# Altium PCB FSBB20CH60C MC3PHAC - Serial.PcbDoc
Units mm, origin at the board's own origin, x right, y up, seen from the top; angles counter-clockwise.
Board outline 110.36 x 81.66 mm, 2 copper layers (Top Layer, Bottom Layer); 61 components, 0 nets, 231 pads, 24 vias.
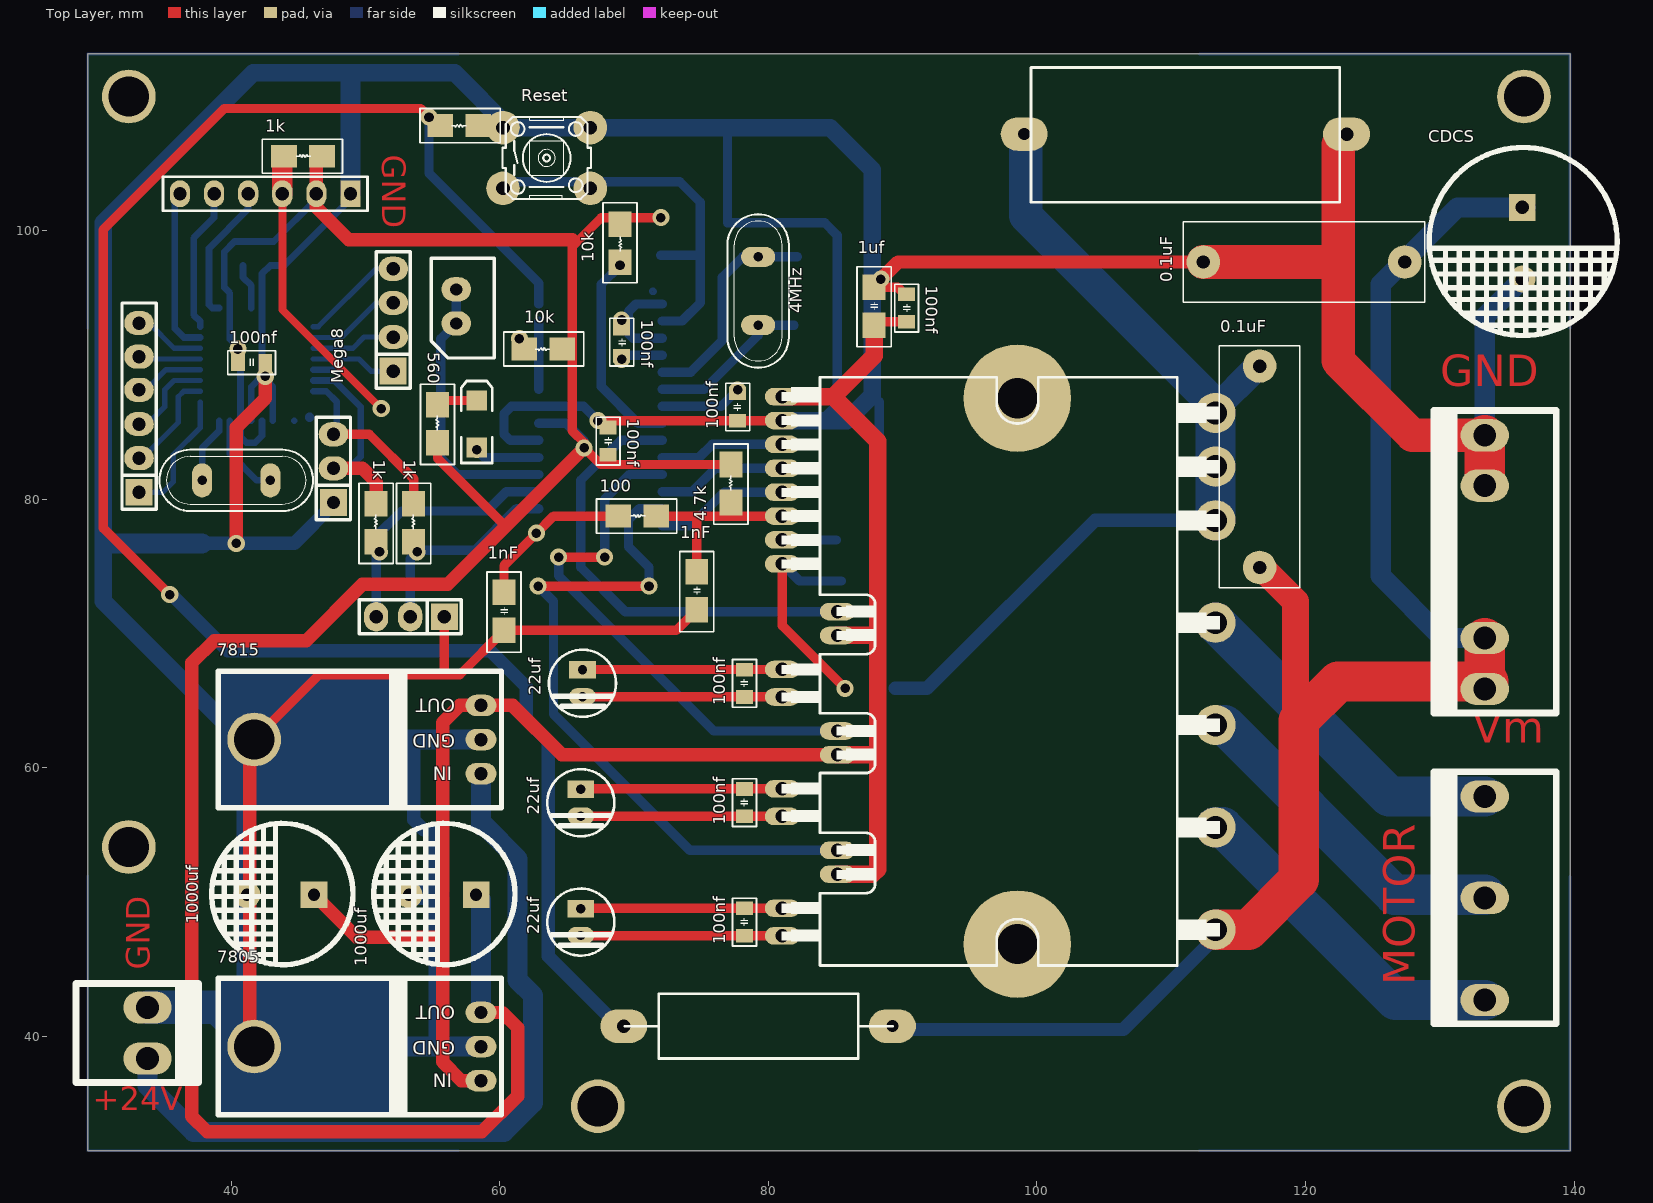
[diagram p0: Top Layer view]
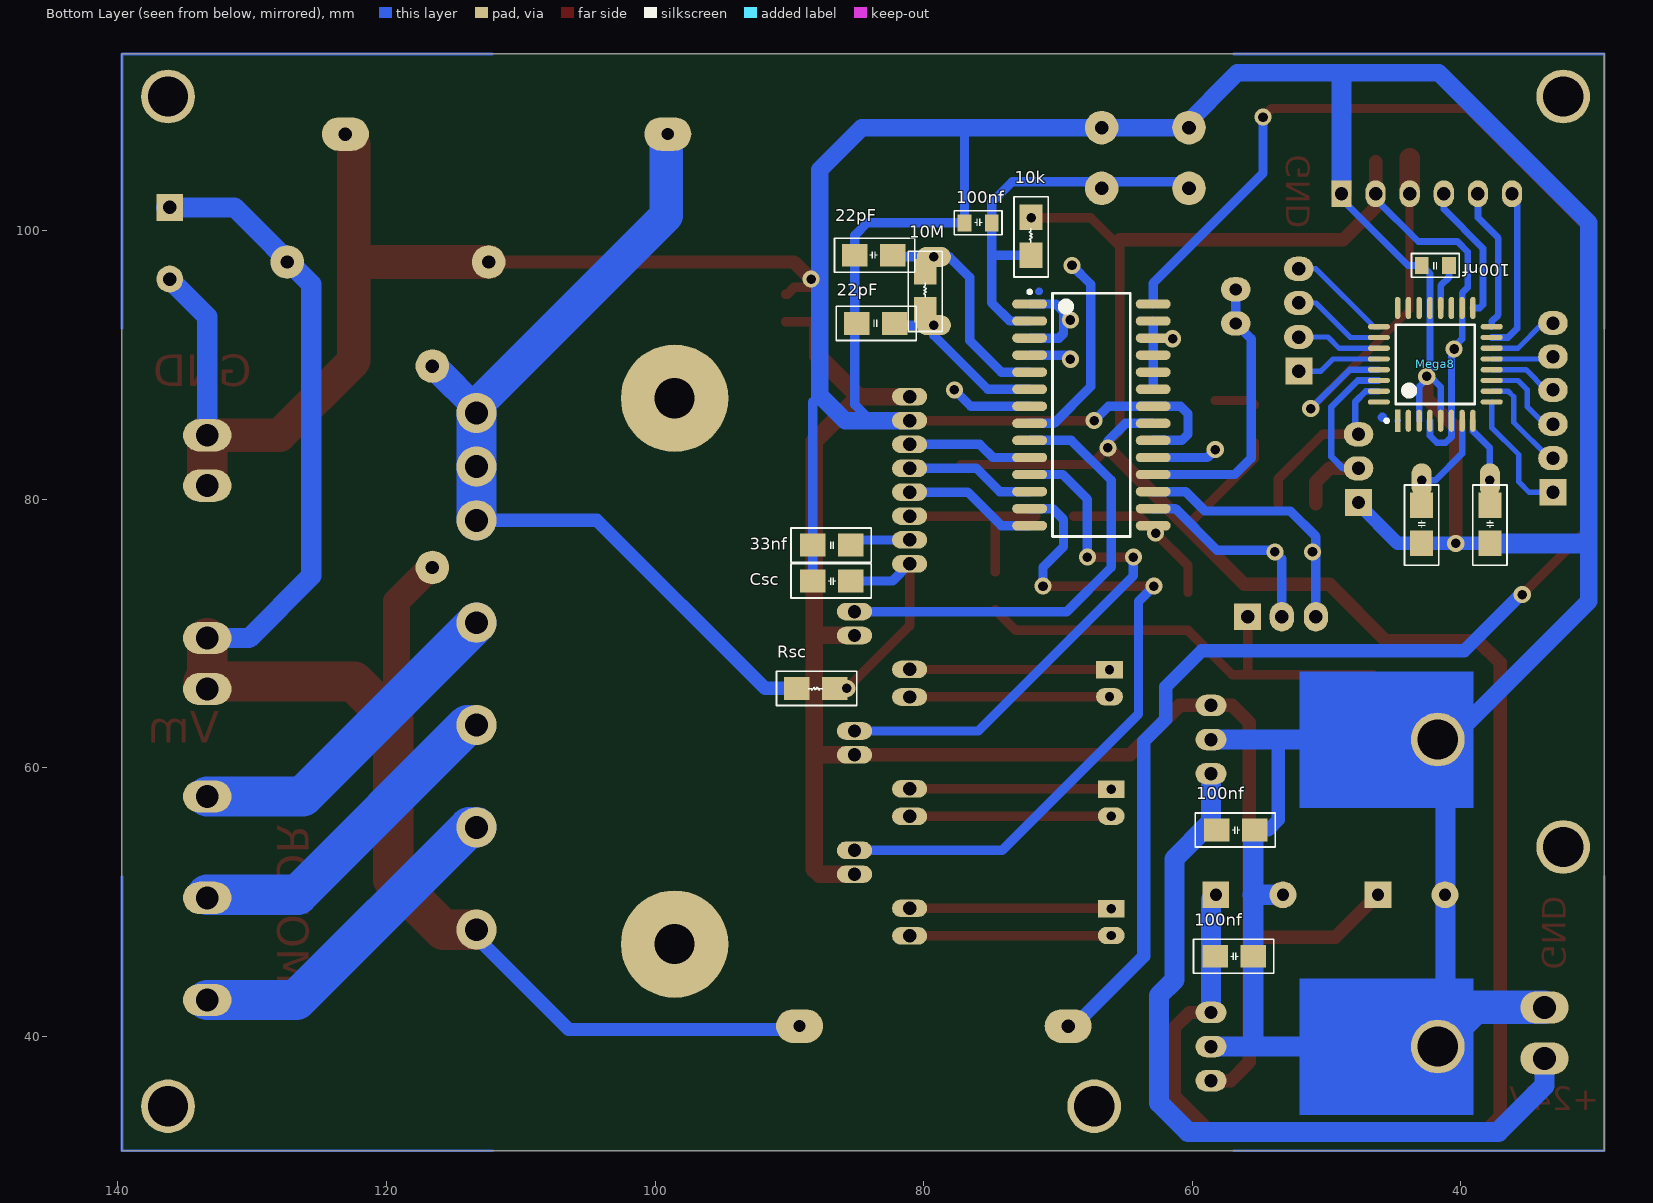
[diagram p1: Bottom Layer view, seen from below]

## Layer stack, top to bottom
Top Solder: solder mask 0.0102, Solder Resist, Dk 3.5
Top Layer: signal copper 0.0356
Dielectric 1: dielectric 0.32, FR-4, Dk 4.8
Bottom Layer: signal copper 0.0356
Bottom Solder: solder mask 0.0102, Solder Resist, Dk 3.5

## Board outline
29.337,31.496 29.337,113.157 139.7,113.157 139.7,31.496

## Design rules (kind name [scope] priority, off if disabled: settings)
Clearance [All] p1: gap=0.254
PolygonConnect [All] p1: connectstyle=Relief reliefconductorwidth=0.254 reliefentries=4 polygonreliefangle="90 Angle" airgapwidth=0.254
RoutingVias [All] p1: holewidth=0.711 width=1.27 viastyle="Through Hole" minholewidth=0.711 minwidth=1.27 maxholewidth=0.711 maxwidth=1.27
SolderMaskExpansion [All] p1: expansion=0.102
Width [All] p1: maxlimit=0.254 minlimit=0.254 preferedwidth=0.254
29 further rules are at their usual default settings.

## Components (designator, comment, footprint, x,y, rotation, side; value= is the part's Value field where it differs from the comment)
0.1uF "Comment" "CAP POL 15mm" 112.395,97.663 r0 top
0.1uF "Comment" "CAP POL 15mm" 116.586,89.916 r270 top
1k "Comment" "Res SMD 0805 & 1206" 53.594,76.835 r270 top
1k "Comment" "Res SMD 0805 & 1206" 50.8,76.835 r270 top
1k "Comment" "Res SMD 0805 & 1206" 43.942,105.537 r180 top
1nF "Comment" "CAP SMD 0805 & 1206" 60.325,70.231 r90 top
1nF "Comment" "CAP SMD 0805 & 1206" 74.676,71.755 r90 top
1uf "Comment" "CAP SMD 0805 & 1206" 87.884,92.964 r90 top
4.7k "Comment" "Res SMD 0805 & 1206" 77.216,79.756 r270 top
4MHz "Comment" XTAL 79.248,95.504 r90 top
10k "Comment" "Res SMD 0805 & 1206" 64.643,91.186 r0 top
10k "Comment" "Res SMD 0805 & 1206" 68.961,100.457 r90 top
10k "Comment" "Res SMD 0805 & 1206" 72.009,98.171 r270 bottom
10M "Comment" "Res SMD 0805 & 1206" 79.883,94.107 r270 bottom
22pF "Comment" "CAP SMD 0805 & 1206" 82.296,98.171 r0 bottom
22pF "Comment" "CAP SMD 0805 & 1206" 82.169,93.091 r0 bottom
22uf "Comment" "CAP 5MM" 66.167,66.294 r90 top
22uf "Comment" "CAP 5MM" 66.04,57.404 r90 top
22uf "Comment" "CAP 5MM" 66.04,48.514 r90 top
33nf "Comment" "CAP SMD 0805 & 1206" 88.265,76.581 r180 bottom
100 "Comment" "Res SMD 0805 & 1206" 68.834,78.74 r180 top
100nf "Comment" "CAP SMD 0805" 42.545,90.17 r180 top
100nf "Comment" "CAP SMD 0805" 42.926,97.409 r180 bottom
100nf "Comment" "CAP SMD 0805" 68.072,83.312 r90 top
100nf "Comment" "CAP SMD 0805" 78.232,67.31 r270 top
100nf "Comment" "CAP SMD 0805" 78.232,58.42 r270 top
100nf "Comment" "CAP SMD 0805" 78.232,49.53 r270 top
100nf "Comment" "CAP SMD 0805 & 1206" 58.166,55.372 r180 bottom
100nf "Comment" "CAP SMD 0805 & 1206" 58.293,45.974 r180 bottom
100nf "Comment" "CAP SMD 0805" 74.93,100.584 r0 bottom
100nf "Comment" "CAP SMD 0805" 77.724,87.884 r270 top
100nf "Comment" "CAP SMD 0805" 69.088,90.678 r90 top
100nf "Comment" "CAP SMD 0805" 90.297,93.218 r90 top
560 "Comment" "Res SMD 0805 & 1206" 55.372,84.201 r270 top
1000uf "Comment" "CAP 10MM" 43.688,50.546 r90 top
1000uf "Comment" "CAP 10MM" 55.753,50.546 r90 top
7805 "Comment" REG-SLEEP 50.165,39.243 r0 top
7815 "Comment" REG-SLEEP 50.165,62.103 r0 top
CDCS "Comment" "CAP 14MM" 136.144,99.06 r180 top
Csc "Comment" "CAP SMD 0805 & 1206" 88.265,73.914 r180 bottom
Mega8 "Comment" ATMEGA8-SMD 41.91,90.043 r90 top
Reset "Comment" SW-4PIN-Small 63.5,105.41 r0 top
Rsc "Comment" "Res SMD 0805 & 1206" 86.614,65.913 r180 bottom
? "Comment" "HEADER 4" 52.07,89.535 r270 top
? "Comment" PROG2 42.545,102.743 r180 top
? "Comment" XTAL 40.386,81.407 r180 top
? "Comment" "HEADER 3"#1 47.625,79.756 r270 top
? "Comment" "CAP SMD 0805 & 1206" 37.846,76.708 r90 bottom
? "Comment" "CAP SMD 0805 & 1206" 42.926,76.708 r90 bottom
? "Comment" "HEADER 6" 33.147,80.518 r270 top
? "Comment" "HEADER 3"#2 55.88,71.247 r0 top
? "Comment" "LED SMD 1206" 58.293,85.598 r90 top
? "Comment" "RES 5W" 99.06,107.188 r0 top
? "Comment" "PIN PWR 5" 133.35,50.292 r90 top
? "Comment" "PIN PWR 6" 133.35,75.311 r90 top
? "Comment" "PIN PWR 2" 33.782,40.259 r270 top
? "Comment" "Pin gerd 2pin" 56.769,94.361 r180 top
? "Comment" "RES 2W" 79.248,40.767 r180 top
? "Comment" "Res SMD 0805 & 1206" 58.42,107.823 r0 top
? "Comment" FSBB30CH60C 97.155,67.564 r0 top
? "Comment" MC3PHAC(SOIC-28) 67.464,86.233 r180 bottom

## Footprints (in the part's own frame and the unit in brackets; to place one, negate y for a bottom-side part, rotate by r counter-clockwise, add the part's x,y. Pads: shape width x height; smd on the part's side, far side on the other; paste and mask are expansions set on the pad)
ATMEGA8-SMD [mm]
  oval 1.65x0.4 smd far side: ADC6(4.2,1.2) ADC7(4.2,-1.2) AREF(4.2,0.4) AVCC(4.2,2) B5/SCK(4.2,2.8) B6/XTAL1(-4.2,2) B7/XTAL2(-4.2,2.8) C0(4.2,-2) C1(4.2,-2.8) D4(-4.2,-2) GND(-4.2,-1.2) GND(-4.2,0.4) GND(4.2,-0.4) VCC(-4.2,-0.4) VCC(-4.2,1.2)
  oval 0.4x1.65 smd far side: B0(-0.4,4.2) B1/OC1A(0.4,4.2) B2/OC1B(1.2,4.2) B3/MOSI/OC2(2,4.2) B4/MISO(2.8,4.2) C2(2.8,-4.2) C3(2,-4.2) C4(1.2,-4.2) C5(0.4,-4.2) C6/RST(-0.4,-4.2) D0/RX(-1.2,-4.2) D1/TX(-2,-4.2) D2/INT0(-2.8,-4.2) D5(-2.8,4.2) D6(-2,4.2) D7(-1.2,4.2)
  rect 1.65x0.4 smd far side: D3/INT1(-4.2,-2.8)
  Bottom Layer circle w0.5: c-3.937,-3.937 r0.1
"CAP 5MM" [mm]
  oval 1.3x2 hole 0.7: 1(-1,0)
  rect 1.3x2 hole 0.7: 2(1,0)
  silkscreen extent -2.5,-2.5 2.5,2.5
"CAP 10MM" [mm] "CAP"
  rect 2x2 hole 0.9: +(0,-2.5)
  round 2 hole 0.9: -(0,2.5)
  silkscreen extent -5.21,-5.39 5.32,5.13
"CAP 14MM" [mm]
  rect 2x2 hole 1: +(0,-2.667)
  round 2 hole 1: -(0,2.667)
  silkscreen extent -7.07,-7.13 6.93,6.87
"CAP POL 15mm" [mm]
  round 2.5 hole 1: 1(0,0) 2(15,0)
  silkscreen extent -1.5,-3 16.5,3
"CAP SMD 0805" [mil]
  rect 40x50 smd: 1(0,0) 2(80,0)
  silkscreen extent -30,-35 110,35
"CAP SMD 0805 & 1206" [mm]
  rect 1.9x1.7 smd: 1(0,0) 2(2.829,0)
  silkscreen extent -1.62,-1.27 4.35,1.27
FSBB30CH60C [mm]
  round 8 hole 3: 0(1.4,-20.69) 0(1.4,19.95)
  oval 2.616x1.308 hole 1: 1:Vcc(-16.1,20.07) 2:COM(-16.1,18.292) 3:IN(UL)(-16.1,16.514) 4:IN(VL)(-16.1,14.736) 5:IN(WL)(-16.1,12.958) 6:VFO(-16.1,11.18) 7:CFOD(-16.1,9.402) 8:CSC(-16.1,7.624) 9:IN(UH)(-12,4.068) 10:Vcc(H)(-12,2.29) 11:VB(U)(-16.1,-0.24) 12:VS(U)(-16.1,-2.29) 13:IN(VH)(-12,-4.822) 14:VCC(H)(-12,-6.6) 15:VB(V)(-16.1,-9.13) 16:VS(V)(-16.1,-11.18) 17:IN(WH)(-12,-13.712) 18:Vcc(H)(-12,-15.49) 19:VB(W)(-16.1,-18.02) 20:VS(W)(-16.1,-20.07)
  round 3 hole 1.7: 21:NU(16.15,18.864) 22:NV(16.15,14.863) 23:NW(16.15,10.863) 24:U(16.15,3.243) 25:V(16.15,-4.377) 26:W(16.15,-11.997) 27:P(16.15,-19.617)
  silkscreen extent -16.17,-22.28 16.5,21.52
"HEADER 3"#1 [mm]
  rect 2x2 hole 1: 1(0,0)
  oval 1.8x2.2 hole 1: Rx(-2.54,0) Tx(-5.08,0)
  silkscreen extent -6.35,-1.27 1.27,1.27
"HEADER 3"#2 [mm]
  rect 2x2 hole 1: GND(0,0)
  oval 1.8x2.2 hole 1: Rx(-2.54,0) Tx(-5.08,0)
  silkscreen extent -6.35,-1.27 1.27,1.27
"HEADER 4" [mm]
  rect 2x2 hole 1: 1(0,0)
  oval 1.8x2.2 hole 1: 2(-2.54,0) 3(-5.08,0) 4(-7.62,0)
  silkscreen extent -8.89,-1.27 1.27,1.27
"HEADER 6" [mm]
  rect 2x2 hole 1: 1(0,0)
  oval 1.8x2.2 hole 1: 2(-2.54,0) 3(-5.08,0) 4(-7.62,0) 5(-10.1,0) 6(-12.6,0)
  silkscreen extent -14.09,-1.27 1.27,1.27
"LED SMD 1206" [mm]
  rect 1.5x1.5 smd: +(1.75,0) -(-1.75,0)
  silkscreen extent -2.9,-1.15 3.2,1.15
MC3PHAC(SOIC-28) [mm]
  oval 2.6x0.7 smd: 1:VREF(-4.65,8.305) 2:RESET(-4.65,7.035) 3:VDDA(-4.65,5.765) 4:VSSA(-4.65,4.495) 5:OSC2(-4.65,3.225) 6:OSC1(-4.65,1.955) 7:PLLCAP(-4.65,0.685) 8:PWMPOL_BASEFREQ(-4.65,-0.585) 9:PWM_U_TOP(-4.65,-1.855) 10:PWM_U_BOT(-4.65,-3.125) 11:PWM_V_TOP(-4.65,-4.395) 12:PWM_V_BOT(-4.65,-5.665) 13:PWM_W_TOP(-4.65,-6.935) 14:PWM_W_BOT(-4.65,-8.205) 15:FAULTIN(4.55,-8.205) 16:PWMFREQ_RxD(4.55,-6.935) 17:RETRY_TxD(4.55,-5.665) 18:RBRAKE(4.55,-4.395) 19:DT_FAULTOUT(4.55,-3.125) 20:VBOOST_MODE(4.55,-1.855) 21:VDD(4.55,-0.585) 22:VSS(4.55,0.685) 23:FWD(4.55,1.955) 24:START(4.55,3.225) 25:MUX_IN(4.55,4.495) 26:SPEED(4.55,5.765) 27:ACCEL(4.55,7.035) 28:DC_BUS(4.55,8.305)
  Top Layer circle w0.254: c-3.95,9.24 r0.158
  silkscreen extent -4.77,-9.01 2.85,9.33
"Pin gerd 2pin" [mm]
  oval 2.2x1.8 hole 0.9: 1(0,1.27) 1(0,-1.27)
  silkscreen extent -2.82,-3.57 1.88,3.85
"PIN PWR 2" [mm] "2PIN"
  oval 2.4x3.6 hole 1.7: 1(-1.9,0) 2(1.9,0)
  silkscreen extent -3.68,-5.33 3.69,3.8
"PIN PWR 5" [mm]
  oval 2.4x3.6 hole 1.7: 1(-7.575,0) 3(0.025,0) 5(7.575,0)
  silkscreen extent -9.35,-5.33 9.43,3.8
"PIN PWR 6" [mm]
  oval 2.4x3.6 hole 1.7: 1(-9.45,0) 2(-5.65,0) 5(5.7,0) 6(9.45,0)
  silkscreen extent -11.23,-5.33 11.3,3.8
PROG2 [mm]
  rect 1.5x2 hole 1: GND(-6.35,0)
  oval 1.5x2 hole 1: MISO/PDO(3.81,0) MOSI/PDI(6.35,0) RST(-1.27,0) SCK(1.27,0) VCC(-3.81,0)
  silkscreen extent -7.62,-1.27 7.62,1.27
REG-SLEEP [mm]
  round 4 hole 3: GND(-8.445,0)
  oval 2.3x1.6 hole 1: GND(8.445,0) IN(8.445,-2.54) OUT(8.445,2.54)
  Bottom Layer region: 1.841,-5.08 1.841,5.08 -11.112,5.08 -11.112,-5.08
  silkscreen extent -11.11,-5.08 9.97,5.08
"RES 2W" [mm]
  oval 3.5x2.5 hole 0.9: 1(-10,0)
  oval 3.5x2.5 hole 1: 2(10,0)
  silkscreen extent -10,-2.41 9.94,2.41
"RES 5W" [mm]
  oval 3.5x2.5 hole 0.9: 1(0,0)
  oval 3.5x2.5 hole 1: 2(24,0)
  silkscreen extent 0.5,-5.08 23.5,4.95
"Res SMD 0805 & 1206" [mm]
  rect 1.9x1.7 smd: 1(0,0) 2(-2.829,0)
  silkscreen extent -4.35,-1.27 1.62,1.27
SW-4PIN-Small [mil]
  round 98.43 hole 40: 1(-128,89) 1(128,89) 2(-128,-89) 2(128,-89)
  silkscreen extent -130,-120 130,120
XTAL [mm] "XTAL"
  oval 1.5x2.54 hole 0.7: 1(-2.54,0) 2(2.54,0)
  silkscreen extent -5.71,-2.29 5.71,2.29

## Free pads (board coordinates)
  round 4 hole 3: 0(32.385,54.102) 0(32.385,109.982) 0(67.31,34.798) 0(136.271,34.798) 0(136.271,109.982)

## Via types
v1: diameter 1.27, hole 0.711, Top Layer to Bottom Layer, 24 vias

## Nets (pads, with @x,y where several pads share a name; then routed paths per layer and width w, separated by ;. In a path a pad name is that pad's centre, name@x,y a point inside that pad or via, vN(x,y) a via of type N, cw(c..) or ccw(c..) an arc to the next point about the centre after c; other vN are vias at no path point)
pads on no net: 0.1uF.1 0.1uF.2 1k.1 1k.2 1nF.1 1nF.2 1uf.1 1uf.2 4.7k.1 4.7k.2 4MHz.1 4MHz.2 10k.1 10k.2 10M.1 10M.2 22pF.1 22pF.2 22uf.1 22uf.2 33nf.1 33nf.2 100.1 100.2 100nf.1 100nf.2 560.1 560.2 1000uf.+ 1000uf.- 7805.GND 7805.IN 7805.OUT 7815.GND 7815.IN 7815.OUT ?.0 ?.1 ?.1:Vcc ?.1:VREF ?.2 ?.2:COM ?.2:RESET ?.3 ?.3:IN(UL) ?.3:VDDA ?.4 ?.4:IN(VL) ?.4:VSSA ?.5 ?.5:IN(WL) ?.5:OSC2 ?.6 ?.6:OSC1 ?.6:VFO ?.7:CFOD ?.7:PLLCAP ?.8:CSC ?.8:PWMPOL_BASEFREQ ?.9:IN(UH) ?.9:PWM_U_TOP ?.10:PWM_U_BOT ?.10:Vcc(H) ?.11:PWM_V_TOP ?.11:VB(U) ?.12:PWM_V_BOT ?.12:VS(U) ?.13:IN(VH) ?.13:PWM_W_TOP ?.14:PWM_W_BOT ?.14:VCC(H) ?.15:FAULTIN ?.15:VB(V) ?.16:PWMFREQ_RxD ?.16:VS(V) ?.17:IN(WH) ?.17:RETRY_TxD ?.18:RBRAKE ?.18:Vcc(H) ?.19:DT_FAULTOUT ?.19:VB(W) ?.20:VBOOST_MODE ?.20:VS(W) ?.21:NU ?.21:VDD ?.22:NV ?.22:VSS ?.23:FWD ?.23:NW ?.24:START ?.24:U ?.25:MUX_IN ?.25:V ?.26:SPEED ?.26:W ?.27:ACCEL ?.27:P ?.28:DC_BUS ?.+ ?.- ?.GND ?.MISO/PDO ?.MOSI/PDI ?.RST ?.Rx ?.SCK ?.Tx ?.VCC CDCS.+ CDCS.- Csc.1 Csc.2 Mega8.ADC6 Mega8.ADC7 Mega8.AREF Mega8.AVCC Mega8.B0 Mega8.B1/OC1A Mega8.B2/OC1B Mega8.B3/MOSI/OC2 Mega8.B4/MISO Mega8.B5/SCK Mega8.B6/XTAL1 Mega8.B7/XTAL2 Mega8.C0 Mega8.C1 Mega8.C2 Mega8.C3 Mega8.C4 Mega8.C5 Mega8.C6/RST Mega8.D0/RX Mega8.D1/TX Mega8.D2/INT0 Mega8.D3/INT1 Mega8.D4 Mega8.D5 Mega8.D6 Mega8.D7 Mega8.GND Mega8.VCC Reset.1 Reset.2 Rsc.1 Rsc.2
copper on no net: | length 2128.3
  Top Layer w0.6: 43.815,102.743 43.815,94.107 v1(51.181,86.741)
  Top Layer w0.7: v1(35.433,72.898) 30.48,77.851 30.48,100.076 39.497,109.093 54.102,109.093 v1(54.737,108.458) ; 41.719,62.103 46.545,66.929 57.023,66.929 60.325,70.231 73.152,70.231 74.676,71.755 ; 47.625,84.836 50.292,84.836 53.594,81.534 53.594,79.664 ; 55.372,84.201 55.372,83.058 60.325,78.105 ; 55.372,87.03 55.69,87.348 58.293,87.348 ; 55.88,66.929 55.88,71.247 ; 60.325,73.06 60.325,75.057 v1(62.738,77.47) 64.012,78.744 68.834,78.744 ; v1(62.865,73.533) v1(71.12,73.533) ; 64.135,81.661 v1(66.294,83.82) ; v1(64.389,75.692) v1(67.818,75.692) ; 65.405,98.806 67.564,100.965 v1(72.009,100.965) ; 65.405,99.314 65.405,85.09 66.294,84.201 v1(66.294,83.82) ; 66.04,56.404 81.035,56.404 ; 66.044,47.494 81.055,47.494 ; 66.054,49.544 81.055,49.544 ; 66.07,58.434 81.055,58.434 ; 66.167,65.294 81.035,65.294 ; 66.197,67.324 81.055,67.324 ; v1@67.31,85.856 81.055,85.856 ; 71.663,78.744 81.055,78.744 ; 74.676,74.584 74.676,78.744 ; 77.216,82.585 67.529,82.585 v1(66.294,83.82) ; 81.055,75.188 81.055,70.583 v1(85.725,65.913) ; 87.884,93.218 90.297,93.218 ; 87.884,95.793 89.627,95.793 90.17,95.25 90.297,95.25
  Top Layer w1: v1(40.386,76.708) 40.386,85.344 42.545,87.503 v1(42.545,89.154) ; 41.402,39.37 41.402,61.785 42.672,63.055 ; 46.188,50.546 49.363,47.371 55.753,47.371 ; 46.355,105.121 46.355,102.743 46.355,101.727 48.768,99.314 65.405,99.314 ; 47.625,82.296 49.784,82.296 50.8,81.28 50.8,79.664 ; 58.61,36.703 57.15,36.703 55.753,38.1 55.753,63.373 57.023,64.643 58.61,64.643 60.96,64.643 64.639,60.964 85.155,60.964 ; 58.801,41.783 58.61,41.783 60.198,41.783 61.341,40.64 61.341,35.56 58.674,32.893 38.227,32.893 37.084,34.036 37.084,67.818 38.735,69.469 45.593,69.469 49.784,73.66 56.134,73.66 v1(66.294,83.82) ; v1(88.392,96.393) 89.662,97.663 112.395,97.663
  Top Layer w1.3: 81.055,87.634 84.832,87.634 ; 85.155,52.074 87.761,52.074 88.138,52.451 88.138,84.328 84.832,87.634 ; 85.155,60.964 88.134,60.964 ; 85.155,69.854 88.015,69.854 ; 87.884,92.964 87.884,90.687 84.832,87.634
  Top Layer w1.5: 43.815,102.743 43.815,105.41
  Top Layer w2: 116.586,74.916 116.727,74.916 119.253,72.39 119.253,62.738
  Top Layer w2.5: 112.395,97.663 122.174,97.663 ; 123.06,107.061 122.428,106.429 122.428,90.297 127.964,84.761 133.35,84.761
  Top Layer w3: 113.305,47.947 115.765,47.947 119.507,51.689 119.507,63.5 122.428,66.421 133.604,66.421 ; 133.35,66.929 133.35,69.661 ; 133.35,81.407 133.35,84.761
  Bottom Layer w0.2: 29.337,51.911 29.337,31.496 56.928,31.496 ; 29.337,92.742 29.337,113.157 56.928,113.157 ; 112.109,31.496 139.7,31.496 139.7,51.911 ; 112.109,113.157 139.7,113.157 139.7,92.742
  Bottom Layer w0.4: 33.147,80.518 34.925,80.518 35.687,81.28 35.687,83.312 37.71,85.335 37.71,87.243 ; 33.147,83.058 33.401,83.058 36.068,85.725 36.068,87.63 36.481,88.043 37.71,88.043 ; 33.147,85.598 33.782,85.598 35.052,86.868 35.052,88.138 35.757,88.843 37.71,88.843 ; 33.147,88.138 33.655,88.138 35.16,89.643 37.71,89.643 ; 33.147,90.618 33.322,90.443 37.71,90.443 ; 33.147,93.118 33.882,93.118 35.757,91.243 37.71,91.243 ; 46.11,90.443 49.511,90.443 50.419,89.535 52.07,89.535 ; 46.11,91.243 49.079,91.243 49.911,92.075 52.07,92.075 ; 46.11,92.043 48.228,92.043 50.8,94.615 52.07,94.615 ; 46.11,92.843 46.488,92.843 50.8,97.155 52.07,97.155
  Bottom Layer w0.5: 36.195,102.743 35.814,102.362 35.814,92.71 36.481,92.043 37.71,92.043 ; 37.71,92.843 37.71,93.227 37.211,93.726 37.211,99.441 38.735,100.965 38.735,102.743 ; 37.846,81.407 37.846,83.82 39.11,85.084 39.11,85.843 ; 39.11,94.243 38.599,94.243 38.354,94.488 38.354,98.679 41.275,101.6 41.275,102.743 ; 39.91,85.843 39.91,83.407 41.91,81.407 42.926,81.407 ; 40.894,97.409 40.894,96.52 41.51,95.904 41.51,94.243 ; 41.51,85.843 41.51,88.373 v1@42.31,89.173 ; 42.31,85.843 42.31,84.728 41.783,84.201 41.148,84.201 40.71,84.639 40.71,85.843 40.71,91.116 39.91,91.916 39.91,94.243 39.91,95.345 39.497,95.758 39.497,98.425 40.259,99.187 43.18,99.187 46.355,102.362 46.355,102.743 ; 43.11,85.843 43.11,88.373 v1@42.31,89.173 ; 44.71,85.843 44.713,85.843 ; 46.11,88.043 47.085,88.043 47.879,87.249 47.879,84.709 ; 46.11,88.843 47.682,88.843 49.657,86.868 49.657,83.185 48.768,82.296 47.625,82.296 ; 46.11,89.643 48.279,89.643 v1(51.181,86.741) ; 48.895,102.743 48.895,102.362 43.942,97.409 42.926,97.409 42.31,96.793 42.31,94.243 v1@42.31,89.173
  Bottom Layer w0.7: 50.8,71.247 50.8,77.216 52.705,79.121 59.055,79.121 60.502,80.568 62.914,80.568 ; 53.34,71.247 53.34,75.565 53.975,76.2 58.166,76.2 61.264,79.298 62.914,79.298 ; v1(54.737,108.458) 54.737,104.267 62.914,96.09 62.914,94.538 ; 56.769,95.631 56.769,93.091 55.626,91.948 55.626,83.058 56.846,81.838 62.914,81.838 ; v1(58.293,83.693) 58.878,83.108 62.914,83.108 ; 60.452,103.378 60.706,103.632 73.406,103.632 74.93,102.108 74.93,100.584 74.93,94.615 73.583,93.268 72.114,93.268 ; v1(62.865,73.533) 64.008,72.39 64.008,64.008 74.164,53.852 85.155,53.852 ; 62.914,84.378 60.783,84.378 60.325,84.836 60.325,86.36 60.883,86.918 63.246,86.918 ; 62.914,85.648 64.974,85.648 66.294,84.328 v1(66.294,83.82) ; 62.914,86.918 66.244,86.918 v1(67.31,85.852) ; 62.914,88.188 62.914,93.268 ; v1(64.389,75.692) 64.389,74.295 75.942,62.742 85.155,62.742 ; v1(67.818,75.692) 67.818,80.01 69.646,81.838 72.114,81.838 ; v1(68.961,97.409) 67.564,96.012 67.564,88.392 70.308,85.648 72.114,85.648 ; v1@69.138,90.728 72.114,90.728 ; v1(71.12,73.533) 71.12,74.93 69.596,76.454 69.596,78.486 70.408,79.298 72.114,79.298 ; 72.009,98.171 74.93,98.171 ; 72.114,78.028 74.218,78.028 76.712,80.522 81.055,80.522 ; 72.114,80.568 74.345,80.568 76.077,82.3 81.055,82.3 ; 72.114,83.108 74.853,83.108 75.823,84.078 81.055,84.078 ; 72.114,84.378 69.011,84.378 66.04,81.407 66.04,74.93 69.338,71.632 85.155,71.632 ; 72.114,86.918 76.504,86.918 v1@77.47,87.884 ; 72.114,88.188 75.234,88.188 79.248,92.202 79.248,92.964 81.915,92.964 ; 72.114,89.458 74.218,89.458 76.581,91.821 76.581,96.52 78.105,98.044 79.248,98.044 82.169,98.044 ; 72.114,91.998 69.927,91.998 69.596,92.329 69.596,93.98 70.154,94.538 72.114,94.538 ; 76.962,107.569 76.962,100.584 84.201,100.584 85.125,99.66 85.125,98.171 85.125,87.03 83.951,85.856 81.055,85.856 ; 81.055,75.188 82.33,73.914 85.436,73.914 ; 81.055,76.966 85.051,76.966 ; 87.757,87.757 88.265,87.249 88.265,73.914
  Bottom Layer w1: v1@35.496,72.962 39.751,68.707 59.309,68.707 61.976,66.04 61.976,63.627 63.627,61.976 63.627,45.974 68.834,40.767 69.248,40.767 ; 37.846,76.708 44.704,76.708 47.688,79.692 ; 41.529,61.341 41.529,62.992 ; 53.594,62.103 53.594,56.134 54.356,55.372 55.337,55.372 ; 54.229,62.103 54.289,62.163 ; 58.61,55.435 58.61,59.563 ; 89.443,65.913 91.821,65.913 104.335,78.427 113.305,78.427 ; 89.662,40.513 106.426,40.513 113.305,47.392 113.305,47.947
  Bottom Layer w1.3: 41.529,61.341 30.48,72.39 30.48,100.584 41.656,111.76 56.642,111.76 60.731,107.671 84.607,107.671 87.757,104.521 87.757,87.757 85.856,85.856 81.055,85.856
  Bottom Layer w1.5: 30.861,76.708 37.846,76.708 ; 33.782,38.359 33.782,36.322 37.211,32.893 60.325,32.893 62.484,35.052 62.484,43.053 61.341,44.196 61.341,53.213 58.801,55.753 ; 41.148,39.243 41.148,62.103 ; 41.529,62.103 58.61,62.103 ; 41.719,39.243 58.61,39.243 ; 48.895,102.743 48.895,111.506 ; 53.253,50.546 55.499,50.546 ; 55.464,39.335 55.464,45.974 55.464,55.245 ; 58.61,41.783 58.61,45.529 58.61,50.188 ; 58.61,55.753 58.61,59.436 ; 133.35,69.661 130.237,69.661 125.603,74.295 125.603,96.012 131.318,101.727 136.398,101.727 ; 133.35,84.761 133.35,93.599 136.144,96.393
  Bottom Layer w2: 113.305,86.428 113.305,86.762 116.332,89.789
  Bottom Layer w2.5: 33.782,42.159 38.994,42.159 41.529,39.624 ; 99.187,107.061 99.187,101.092 113.305,86.974 113.305,86.428
  Bottom Layer w3: 113.305,55.567 113.851,55.567 126.701,42.717 133.35,42.717 ; 113.305,70.807 126.245,57.867 133.35,57.867 ; 113.305,78.427 113.305,86.428 ; 113.978,63.187 126.619,50.546 133.35,50.546
  other v1: 51.054,76.073 53.848,76.073 77.724,88.138 69.088,90.424 40.513,91.186 61.468,91.948 69.088,93.345

## Other copper
Top Layer:
  text "GND" at 50.673,105.664 h3 r270
  text "GND" at 130.048,87.63 h4
  text "Vm" at 132.461,61.087 h4
  text "GND" at 34.544,44.958 h3 r90
  text "MOTOR" at 128.905,43.815 h4 r90
  text "+24V" at 29.718,33.909 h3

## Text inside footprints (layer, text, board x,y; h text height)
7805: Top Overlay "IN" at 56.451,37.211 h1 r180; Top Overlay "GND" at 56.706,39.624 h1 r180; Top Overlay "OUT" at 56.706,42.291 h1 r180
7815: Top Overlay "IN" at 56.451,60.071 h1 r180; Top Overlay "GND" at 56.706,62.484 h1 r180; Top Overlay "OUT" at 56.706,65.151 h1 r180